# EAGLE board DAC_GainOutputStage5 (EAGLE 9.6.2)
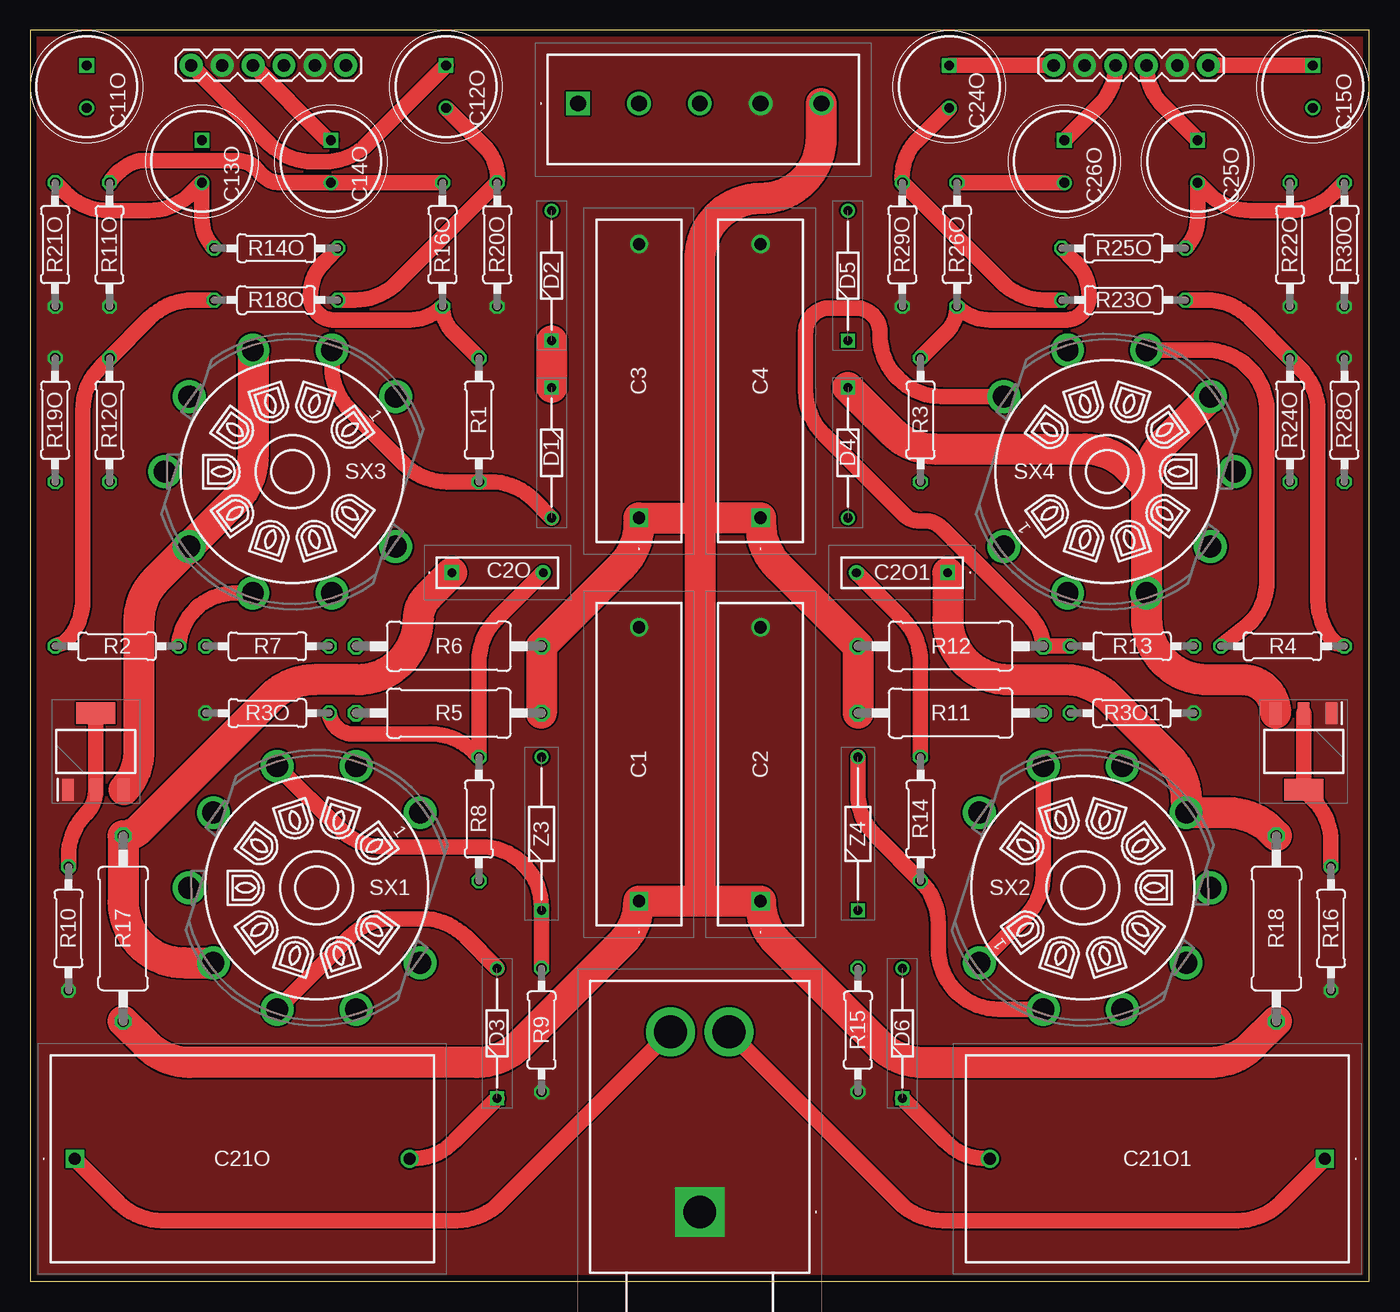
[diagram p0: board, top side]
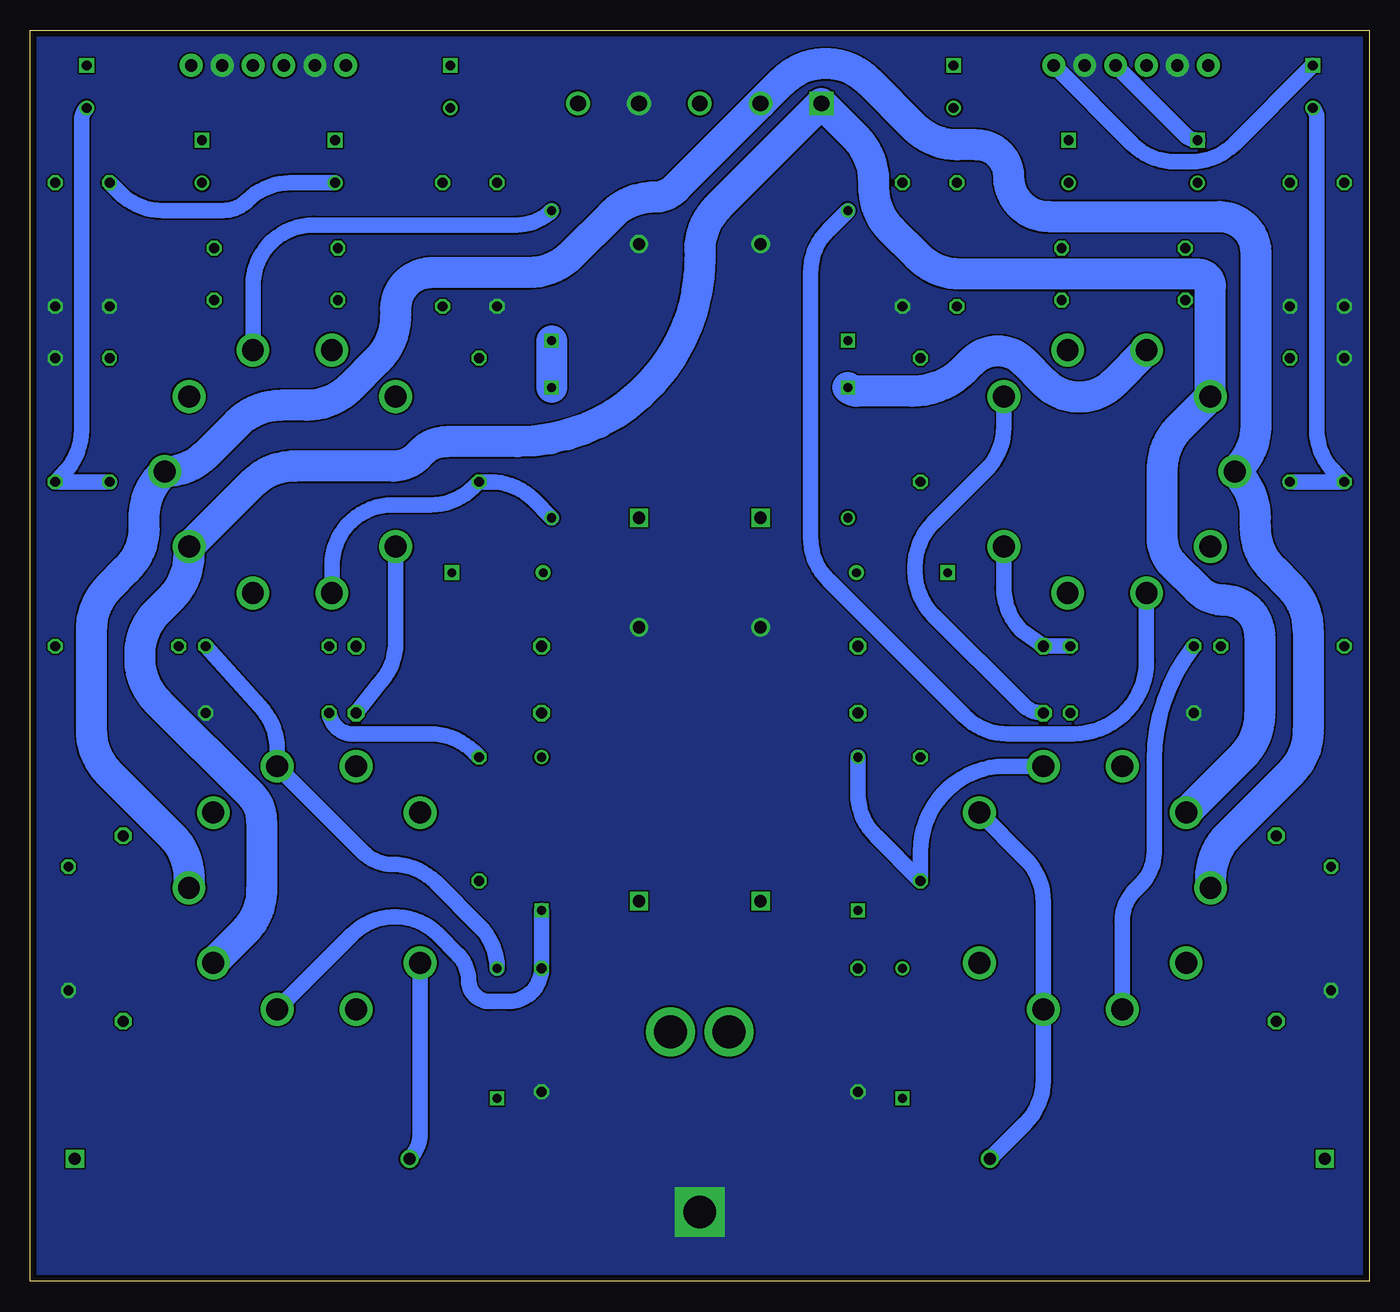
[diagram p1: board, bottom side, seen from below]

Size 110 x 102.8 mm. Coordinates in mm from the lower left corner, seen from the top.
Outline: 0,0 110,0 110,102.8 0,102.8 0,0
Copper layers (1*16): Top 0.035mm / dielectric 1.6mm / Bottom 0.035mm
Design rules "Elecrow_2-layer_PCB_eagle_rule": minimum track width 6mil, minimum drill 12mil, track to track 6mil, track to pad 6mil, pad to pad 6mil, via to via 8mil, smd to smd 0mil, copper to edge 20mil, drill to drill 10mil, minimum pad ring 6mil, minimum via ring 6mil, stop-mask expansion 0mil, vias tented up to drill 100mil, thermal gap 10mil
Net classes: 1 Signal: width 1.272 mm; 2 Power: width 2.54 mm

## Footprints (pad centres in the part's own frame; a part is rotated, then mirrored left to right if it is on the bottom)
MKP4G034705D00KSSD = drill 1 pad 1.5 square: 1 0,0 | drill 1 pad 1.5: 2 22.5,0
MKS4B031002A00JC00 = drill 0.7 pad 1.2 square: 1 0,0 | drill 0.7 pad 1.2: 2 7.5,0
CAPPRD350W60D825H1300 = drill 0.8 pad 1.2 square: 1 0,0 | drill 0.8 pad 1.2: 2 3.5,0
DCP4G053006ID2KSSD = drill 1 pad 1.5 square: 1 0,0 | drill 1 pad 1.5: 2 27.5,0
DIOAD1068W53L380D172 = drill 0.75 pad 1.15 square: 1 0,0 | drill 0.75 pad 1.15: 2 10.7,0
1935190 = drill 1.3 pad 1.95 square: 1 0,0 | drill 1.3 pad 1.95: 2 5,0; 3 10,0; 4 15,0; 5 20,0
1X06 = drill 1.016 pad 1.88: 1 0,0; 2 2.54,0; 3 5.08,0; 4 7.62,0; 5 10.16,0; 6 12.7,0
SJ63033A = drill 2.69 pad 4.035 square: 1 0,0 | drill 2.69 pad 4.035: 2 14.8,-2.4; 3 14.8,2.4
0207/10 = drill 0.813 octagon: 1 -5.08,0; 2 5.08,0
0411/15 = drill 0.914 octagon: 1 -7.62,0; 2 7.62,0
VT9-PT = drill 1.8 pad 2.4: 1 6.172,8.495; 2 0,10.5; 3 -6.172,8.495; 4 -9.986,3.245; 5 -9.986,-3.245; 6 -6.172,-8.495; 7 0,-10.5; 8 6.172,-8.495; 9 9.986,-3.244
SOT230P700X180-4N = smd 1.75 x 0.95: 1 -3.15,2.3; 2 -3.15,0; 3 -3.15,-2.3 | smd 1.75 x 3.2: 4 3.15,0
DIOAD1256W56L444D203 = drill 0.75 pad 1.15 square: 1 0,0 | drill 0.75 pad 1.15: 2 12.6,0

## Placement (x,y rotation side)
C1  MKP4G034705D00KSSD  [MKP4G034705D00KSSD]  50,31.25 90 top
C2  MKP4G034705D00KSSD  [MKP4G034705D00KSSD]  60,31.25 90 top
C2O  0.1uF, 35V  [MKS4B031002A00JC00]  34.62,58.25 0 top
C2O1  0.1uF, 35V  [MKS4B031002A00JC00]  75.38,58.25 180 top
C3  MKP4G034705D00KSSD  [MKP4G034705D00KSSD]  50,62.75 90 top
C4  MKP4G034705D00KSSD  [MKP4G034705D00KSSD]  60,62.75 90 top
C11O  100uF  [CAPPRD350W60D825H1300]  4.62,99.92 270 top
C12O  100uF  [CAPPRD350W60D825H1300]  34.15,99.92 270 top
C13O  100uF  [CAPPRD350W60D825H1300]  14.08,93.78 270 top
C14O  100uF  [CAPPRD350W60D825H1300]  24.69,93.78 270 top
C15O  100uF  [CAPPRD350W60D825H1300]  105.38,99.92 270 top
C21O  30uF/400V  [DCP4G053006ID2KSSD]  3.65,10.08 0 top
C21O1  30uF/400V  [DCP4G053006ID2KSSD]  106.35,10.08 180 top
C24O  100uF  [CAPPRD350W60D825H1300]  75.5,99.92 270 top
C25O  100uF  [CAPPRD350W60D825H1300]  95.92,93.78 270 top
C26O  100uF  [CAPPRD350W60D825H1300]  84.96,93.78 270 top
D1  1N4148-T50R  [DIOAD1068W53L380D172]  42.83,73.45 270 top
D2  1N4148-T50R  [DIOAD1068W53L380D172]  42.83,77.3 90 top
D3  1N4148-T50R  [DIOAD1068W53L380D172]  38.35,15.04 90 top
D4  1N4148-T50R  [DIOAD1068W53L380D172]  67.17,73.45 270 top
D5  1N4148-T50R  [DIOAD1068W53L380D172]  67.17,77.3 90 top
D6  1N4148-T50R  [DIOAD1068W53L380D172]  71.65,15.04 90 top
J1  1935190  [1935190]  45,96.8 0 top
J2  [1X06]  84.09,99.92 0 top
J3  SJ-63033A  [SJ63033A]  55,5.7 90 top
J13  [1X06]  13.21,99.92 0 top
R1  1k  [0207/10]  36.85,70.78 90 top
R2  1k  [0207/10]  7.11,52.2 180 top
R3  1k  [0207/10]  73.15,70.78 90 top
R3O  1M*  [0207/10]  19.48,46.7 180 top
R3O1  1M*  [0207/10]  90.52,46.7 0 top
R4  1k  [0207/10]  102.89,52.2 0 top
R5  9.1k  [0411/15]  34.38,46.7 0 top
R6  9.1k  [0411/15]  34.38,52.2 0 top
R7  1k  [0207/10]  19.48,52.2 0 top
R8  1k  [0207/10]  36.85,38 90 top
R9  330  [0207/10]  42,20.66 90 top
R10  48.7  [0207/10]  3.13,29 90 top
R11  9.1k  [0411/15]  75.62,46.7 180 top
R11O  10k  [0207/10]  6.5,85.2 270 top
R12  9.1k  [0411/15]  75.62,52.2 180 top
R12O  182  [0207/10]  6.5,70.78 270 top
R13  1k  [0207/10]  90.52,52.2 180 top
R14  1k  [0207/10]  73.15,38 90 top
R14O  182  [0207/10]  20.18,84.9 180 top
R15  330  [0207/10]  68,20.66 90 top
R16  48.7  [0207/10]  106.87,29 90 top
R16O  182  [0207/10]  33.86,85.2 90 top
R17  499  [0411/15]  7.62,29 90 top
R18  499  [0411/15]  102.38,29 270 top
R18O  182  [0207/10]  20.18,80.65 0 top
R19O  10k  [0207/10]  2.03,70.78 270 top
R20O  10k  [0207/10]  38.35,85.2 270 top
R21O  10k  [0207/10]  2.03,85.2 90 top
R22O  10k  [0207/10]  103.5,85.2 270 top
R23O  182  [0207/10]  89.82,80.65 180 top
R24O  182  [0207/10]  103.5,70.78 270 top
R25O  182  [0207/10]  89.82,84.9 0 top
R26O  182  [0207/10]  76.14,85.2 90 top
R28O  10k  [0207/10]  107.97,70.78 270 top
R29O  10k  [0207/10]  71.65,85.2 270 top
R30O  10k  [0207/10]  107.97,85.2 90 top
SX1  VT9-PT  [VT9-PT]  23.53,32.35 342 top
SX2  VT9-PT  [VT9-PT]  86.47,32.35 162 top
SX3  VT9-PT  [VT9-PT]  21.53,66.55 342 top
SX4  VT9-PT  [VT9-PT]  88.47,66.55 162 top
U1  LM317MQDCYR  [SOT230P700X180-4N]  5.38,43.55 90 top
U2  LM317MQDCYR  [SOT230P700X180-4N]  104.62,43.55 270 top
Z3  1N750  [DIOAD1256W56L444D203]  42,30.48 90 top
Z4  1N750  [DIOAD1256W56L444D203]  68,30.48 90 top

## Library data of the parts
C1-C4 = Dual Mono Amp Library; DESCRIPTION: 0.47 F Film Capacitor 220V 400V Polypropylene (PP), Metallized Radial; HEIGHT: 16.5mm; MANUFACTURER_NAME: WIMA; MANUFACTURER_PART_NUMBER: MKP4G034705D00KSSD; MOUSER_PART_NUMBER: 505-MKP4G034705DKSSD; MOUSER_PRICE-STOCK: http://www.mouser.com/Search/ProductDetail.aspx?qs=sJjjjplDs9uaOctv9bTMfA%3d%3d
C2O C2O1 = Dual Mono Amp Library; DESCRIPTION: Film Capacitors MKS 4 0.1 uF 50 VDC 2.5x7x10 PCM 7.5; HEIGHT: 7mm; MANUFACTURER_NAME: WIMA; MANUFACTURER_PART_NUMBER: MKS4B031002A00JC00; MOUSER_PART_NUMBER: 505-MKS4B0312AJC; MOUSER_PRICE-STOCK: https://www.mouser.co.uk/ProductDetail/WIMA/MKS4B031002A00JC00?qs=2G4irm%2FqADy9MV8AUfKNYA%3D%3D
C11O C12O C13O C14O C15O C24O C25O C26O = Dual Mono Amp Library; ARROW_PART_NUMBER: UFW1H101MPD1TD; ARROW_PRICE-STOCK: https://www.arrow.com/en/products/ufw1h101mpd1td/nichicon; DESCRIPTION: Aluminum Electrolytic Capacitors - Radial Leaded 100uF 50 Volts 20%; HEIGHT: 13mm; MANUFACTURER_NAME: Nichicon; MANUFACTURER_PART_NUMBER: UFW1H101MPD1TD; MOUSER_PART_NUMBER: 647-UFW1H101MPD1TD; MOUSER_PRICE-STOCK: https://www.mouser.co.uk/ProductDetail/Nichicon/UFW1H101MPD1TD?qs=WJSLByB5Mu30jPPJ2KiG3A%3D%3D
C21O C21O1 = Dual Mono Amp Library; DESCRIPTION: Film Capacitors DC-LINK MKP 4 30.0 uF 400 VDC 17x34.5x31.5 PCM 27.5; HEIGHT: 34.5mm; MANUFACTURER_NAME: WIMA; MANUFACTURER_PART_NUMBER: DCP4G053006ID2KSSD; MOUSER_PART_NUMBER: 505-DCP4G0536ID2KSSD; MOUSER_PRICE-STOCK: https://www.mouser.co.uk/ProductDetail/WIMA/DCP4G053006ID2KSSD?qs=RB4whv9F6rwxZ2Ey0tRejg%3D%3D
D1-D6 = Dual Mono Amp Library; DESCRIPTION: Diodes - General Purpose, Power, Switching Hi Conductance Fast; HEIGHT: mm; MANUFACTURER_NAME: onsemi; MANUFACTURER_PART_NUMBER: 1N4148-T50R; MOUSER_PART_NUMBER: 512-1N4148T50R; MOUSER_PRICE-STOCK: https://www.mouser.co.uk/ProductDetail/onsemi-Fairchild/1N4148-T50R?qs=0lQeLiL1qyZS6rosZp7Ehg%3D%3D
J1 = Dual Mono Amp Library; DESCRIPTION: PCB terminal block, nominal current: 17.5 A, rated voltage (III/2): 400 V, nominal cross section: 1.5 mm?, Number of potentials: 5, Number of rows: 1, Number of positions per row: 5, product range: PT 1,5/..-H, pitch: 5 mm, connection method: Screw connection with wire protector, mounting: Wave soldering, conductor/PCB connection direction: 0 ?, color: green, Pin layout: Linear pinning, Solder pin [P]: 3.5 mm, type of packaging: packed in cardboard; HEIGHT: 11.55mm; MANUFACTURER_NAME: Phoenix Contact; MANUFACTURER_PART_NUMBER: 1935190; MOUSER_PART_NUMBER: 651-1935190; MOUSER_PRICE-STOCK: https://www.mouser.co.uk/ProductDetail/Phoenix-Contact/1935190?qs=QWULklcAmSS%2FS46GSzyZOw%3D%3D
J2 J13 = Dual Mono Amp Library; PROD_ID: CONN-08437
J3 = Dual Mono Amp Library; DESCRIPTION: 6.35 mm, Stereo, Right Angle, Through Hole Mount, 3 Conductors, 0 Internal Switches, Audio Jack Connector; HEIGHT: 12.3mm; MANUFACTURER_NAME: CUI Devices; MANUFACTURER_PART_NUMBER: SJ-63033A
R1-R4 R7 R8 R13 R14 = Dual Mono Amp Library; DESCRIPTION: Body Features: Lead Type Axial-Leaded | Configuration Features: Number of Resistors 1 | Dimensions: Passive Component Dimensions 6.2 x 2.3 MM | Electrical Characteristics: Passive Component Tolerance 1 PCT | Resistance Value 1K OHM | Operating Voltage 350 V | Power Rating .6 WATT | Resistance Class 1k 1M | Packaging Features: Packaging Method Ammo Packed | Product Type Features: Element Type Thin Film | Resistor Type General Purpose Resistor | Termination Features: Termination Area Base Material Cop; HEIGHT: mm; MANUFACTURER_NAME: TE Connectivity; MANUFACTURER_PART_NUMBER: LR1F1K0; MOUSER_PART_NUMBER: 279-LR1F1K0; MOUSER_PRICE-STOCK: https://www.mouser.co.uk/ProductDetail/TE-Connectivity-Holsworthy/LR1F1K0?qs=ip69W3eHERVhMxNSZkerTg%3D%3D
R3O R3O1 = Dual Mono Amp Library; DESCRIPTION: TE Connectivity Axial Metal Film Resistor 1m +/-1% 0.6W +/-50ppm/C; HEIGHT: mm; MANUFACTURER_NAME: TE Connectivity; MANUFACTURER_PART_NUMBER: LR1F1M0; MOUSER_PART_NUMBER: 279-LR1F1M0; MOUSER_PRICE-STOCK: https://www.mouser.co.uk/ProductDetail/TE-Connectivity-Holsworthy/LR1F1M0?qs=ip69W3eHERVt%2FmQVAugcSg%3D%3D
R5 R6 R11 R12 = Dual Mono Amp Library; DESCRIPTION: VISHAY - PR02000209101FA100 - Through Hole Resistor, 9.1 kohm, PR02 Series, 2 W, +/- 5%, Axial Leaded, 500 V; HEIGHT: mm; MANUFACTURER_NAME: Vishay; MANUFACTURER_PART_NUMBER: PR02000209101FA100; MOUSER_PART_NUMBER: 594-PR02000209101FA1; MOUSER_PRICE-STOCK: https://www.mouser.com/ProductDetail/Vishay-BC-Components/PR02000209101FA100?qs=sGAEpiMZZMtlubZbdhIBILAdz%2F2y2rDs5x9O1ZBVKlg%3D
R9 R15 = Dual Mono Amp Library; DESCRIPTION: Body Features: Lead Type Axial-Leaded | Configuration Features: Number of Resistors 1 | Dimensions: Passive Component Dimensions 6.2 x 2.3 MM | Electrical Characteristics: Resistance Value 330 OHM | Power Rating .6 WATT | Passive Component Tolerance 1 PCT | Operating Voltage 350 V | Resistance Class Up to 1k | Packaging Features: Packaging Method Ammo Packed | Product Type Features: Resistor Type General Purpose Resistor | Element Type Thin Film | Termination Features: Number of Terminations 2 | Terminati; HEIGHT: mm; MANUFACTURER_NAME: TE Connectivity; MANUFACTURER_PART_NUMBER: LR1F330R; MOUSER_PART_NUMBER: 279-LR1F330R; MOUSER_PRICE-STOCK: https://www.mouser.co.uk/ProductDetail/TE-Connectivity-Holsworthy/LR1F330R?qs=ip69W3eHERU18wOSJKTVaQ%3D%3D
R10 R16 = Dual Mono Amp Library; DESCRIPTION: Metal Film Resistors - Through Hole 1/8watt 48.7ohms 1% 100ppm; HEIGHT: mm; MANUFACTURER_NAME: Vishay; MANUFACTURER_PART_NUMBER: RN55D48R7FB14; MOUSER_PART_NUMBER: 71-RN55D-F-48.7; MOUSER_PRICE-STOCK: https://www.mouser.com/ProductDetail/Vishay-Dale/RN55D48R7FB14?qs=sGAEpiMZZMsPqMdJzcrNwqLSjlxN7Le6H%2Fnooot2Cxw%3D
R11O R19O R20O R21O R22O R28O R29O R30O = Dual Mono Amp Library; DESCRIPTION: Metal film resistor, 10K 0.6W TE Connectivity LR1F Series Axial Metal Film Resistor 10k; HEIGHT: mm; MANUFACTURER_NAME: TE Connectivity; MANUFACTURER_PART_NUMBER: LR1F10K; MOUSER_PART_NUMBER: 279-LR1F10K; MOUSER_PRICE-STOCK: https://www.mouser.co.uk/ProductDetail/TE-Connectivity-Holsworthy/LR1F10K?qs=ip69W3eHERWDLLWs2Qv0Lg%3D%3D
R12O R14O R16O R18O R23O R24O R25O R26O = Dual Mono Amp Library; DESCRIPTION: Metal Film Resistors - Through Hole 0.6W 1% 182 ohm 50pp m; HEIGHT: mm; MANUFACTURER: Yageo; MANUFACTURER_PART_NUMBER: MF0207FTE52-182R; MOUSER_PART_NUMBER: 603-MF0207FTE52-182R; MOUSER_PRICE-STOCK: https://www.mouser.com/ProductDetail/YAGEO/MF0207FTE52-182R?qs=KUIzHt%2Fe91leK267FaM40g%3D%3D
R17 R18 = Dual Mono Amp Library; DESCRIPTION: VISHAY - PR02000204990FA100 - Through Hole Resistor, 499 ohm, PR02 Series, 2 W, +/- 5%, Axial Leaded, 500 V; HEIGHT: mm; MANUFACTURER_NAME: Vishay; MANUFACTURER_PART_NUMBER: PR02000204990FA100; MOUSER_PART_NUMBER: 594-PR02000204990FA1; MOUSER_PRICE-STOCK: https://www.mouser.com/ProductDetail/Vishay-BC-Components/PR02000204990FA100?qs=bTzheeSci6S93b9bbmXKjA%3D%3D
SX1-SX4 = Dual Mono Amp Library
U1 U2 = Dual Mono Amp Library; DESCRIPTION: Standard Regulator 1.25V to 37V 0.5A Texas Instruments LM317MQDCYR, Single Linear Voltage Regulator, 500mA Adjustable 1.25 37 V, 4-Pin SOT-223; HEIGHT: 1.8mm; MANUFACTURER_NAME: Texas Instruments; MANUFACTURER_PART_NUMBER: LM317MQDCYR; MOUSER_PART_NUMBER: 595-LM317MQDCYR; MOUSER_PRICE-STOCK: https://www.mouser.co.uk/ProductDetail/Texas-Instruments/LM317MQDCYR?qs=VBduBm9rCJSAPGr9YDjocQ%3D%3D
Z3 Z4 = Dual Mono Amp Library; DESCRIPTION: Zener Diodes Voltage Regulator; HEIGHT: mm; MANUFACTURER_NAME: Microsemi Corporation; MANUFACTURER_PART_NUMBER: 1N750; MOUSER_PART_NUMBER: 494-1N750(DO-35); MOUSER_PRICE-STOCK: https://www.mouser.co.uk/ProductDetail/Microchip-Microsemi/1N750?qs=Xwz%252BGKGy4sB1rzIdx4SmVg%3D%3D

## Nets
66.3VAC/1 [Power]: J1.1 SX1.4 SX2.4 SX3.4 SX4.4
66.3VAC/2 [Power]: J1.2 SX1.5 SX2.5 SX3.5 SX4.5
+240VDC [Power]: C1.1 C2.1 C3.1 C4.1 J1.5 R5.2 R6.2 R11.2 R12.2 R17.1 R18.2
AGND [Power]: C1.2 C2.2 C3.2 C4.2 J1.4 J2.2 J2.5 J3.1 J13.2 J13.5 R3O1.2 R3O.2 R9.1 R10.1 R11O.2 R15.1 R16.1 R19O.1 R20O.2 R21O.1 R22O.2 R28O.1 R29O.2 R30O.1 U1.1 U2.1
L+ [Signal]: R4.2 R23O.1 R24O.1
L- [Signal]: R3.2 R25O.1 R26O.1
L_OUT [Signal]: C21O1.1 J3.2
N$1: R6.1 R7.2 SX3.9
N$2: R8.1 SX1.2 Z3.2
N$3: C21O1.2 D6.1 SX2.1 SX2.8
N$4: D4.2 R3.1 SX4.2
N$5: D5.2 R4.1 SX4.7
N$6: D1.2 R1.1 SX3.2
N$7 [Power]: D4.1 D5.1 SX4.3 SX4.6 U2.3
N$8: R11.1 SX4.1
N$9: R12.1 R13.2 SX4.9
N$10: C11O.1 J13.6
N$11: C11O.2 R12O.2 R19O.2
N$12: C15O.1 J2.6
N$13: D2.2 R2.1 SX3.7
N$14: R14.1 SX2.2 Z4.2
N$15: C12O.1 J13.1
N$16: C2O.2 R3O.1 R8.2
N$17: C2O1.2 R3O1.1 R14.2
N$18: C21O.2 D3.1 SX1.1 SX1.8
N$19: C12O.2 R18O.2 R20O.1
N$20: C15O.2 R24O.2 R28O.2
N$21: C13O.1 J13.4
N$22 [Power]: D1.1 D2.1 SX3.3 SX3.6 U1.3
N$23: D3.2 R7.1 SX1.7
N$24: C14O.1 J13.3
N$25: C14O.2 R11O.1 R16O.2
N$26: R9.2 SX1.3 Z3.1
N$27: R15.2 SX2.3 Z4.1
N$28: C13O.2 R14O.2 R21O.2
N$29: D6.2 R13.1 SX2.7
N$30: C24O.1 J2.1
N$31: C24O.2 R23O.2 R29O.1
N$32: C25O.1 J2.4
N$33: C26O.1 J2.3
N$34: C26O.2 R22O.1 R26O.2
N$35: R5.1 SX3.1
N$36: C25O.2 R25O.2 R30O.2
N$37: R10.2 U1.2 U1.4
N$38: R16.2 U2.2 U2.4
N$39 [Power]: C2O.1 R17.2 SX1.6
N$40 [Power]: C2O1.1 R18.1 SX2.6
PE [Power]: J1.3
R+ [Signal]: R2.2 R12O.1 R18O.1
R- [Signal]: R1.2 R14O.1 R16O.1
R_OUT [Signal]: C21O.1 J3.3

## Tracks (layer width: path | path; a pad name or v marks a point on that pad's centre or on a via)
66.3VAC/1
  Bottom 2.54: SX2.4 92.46,28.68 arc-45 91,32.22 91,37.86 arc-45 91.88,39.98 99.54,47.64 arc45 101,51.17 101,51.53 arc45 99.54,55.06 98.43,56.17 arc-45 96.97,59.7 SX4.4 91.81,65.54 arc45 88.27,67 80.16,67 arc-45 78.18,67.82 77.82,68.18 arc45 75.84,69 70,69 arc-90 55,84 55,84.73 arc45 53.54,88.26 J1.1 42.16,93.96 arc45 40.7,90.43 40.7,89.92 arc-45 39.24,86.39 37.09,84.24 arc-45 33.55,82.77 14.03,82.77 arc90 13.03,81.77 SX3.4 15.54,70.22 arc-45 17,66.68 17,61.04 arc-45 16.12,58.92 14.08,56.88 arc-45 11.96,56 arc90 9,53.04 9,46.63 arc45 10.46,43.09 SX1.4
66.3VAC/2
  Bottom 2.54: SX1.5 13.03,33.12 arc45 11.56,36.66 6.46,41.76 arc-45 5,45.3 5,53.53 arc-45 6.46,57.06 7.88,58.48 arc45 9.35,62.01 9.35,62.8 arc-45 10.81,66.33 SX3.5 10.76,66.81 arc-45 9.3,70.35 9.3,84.5 arc-90 12.3,87.5 26.35,87.5 arc90 29.6,90.75 arc-90 32.25,93.4 33.83,93.4 arc45 37.36,94.86 41.11,98.61 arc-90 48.19,98.61 J1.2 56.97,89.83 arc45 58.73,89.1 arc-45 62.26,87.64 65.54,84.36 arc45 69.07,82.9 77,82.9 arc-90 80,79.9 80,79.27 arc45 81.46,75.74 83.74,73.46 arc45 87.27,72 89.45,72 arc-45 92.99,70.54 95.56,67.96 arc45 SX4.5 99.19,66.33 arc-45 100.65,62.8 100.65,62.01 arc45 102.12,58.48 103.54,57.06 arc-45 105,53.53 105,45.3 arc-45 103.54,41.76 98.44,36.66 arc45 96.97,33.12 SX2.5
+240VDC
  Top 2.54: 55,62.75 C3.1 50,62.27 arc-45 48.54,58.73 R6.2 R5.2 | 55,62.75 C4.1 60,62.27 arc45 61.46,58.73 R12.2 R11.2 | 55,31.25 C1.1 arc-45 48.59,27.84 40.21,19.46 arc-45 36.68,18 13.07,18 arc-45 9.54,19.46 R17.1 | 55,31.25 C2.1 arc45 61.41,27.84 69.79,19.46 arc45 73.32,18 96.93,18 arc45 100.46,19.46 R18.2 | J1.5 65,94 arc-90 60,89 arc90 55,84 55,62.75 | 55,62.75 55,31.25
AGND
  pour Bottom (rank 6, no thermals): 0,0 110,0 110,102.8 0,102.8
  pour Top (rank 6, no thermals): 0,0 110,0 110,102.8 0,102.8
L+
  Top 1.272: R23O.1 96.64,80.65 arc-45 100.18,79.18 R24O.1 104.34,75.03 arc-45 105.8,71.49 105.8,55.94 arc45 107.26,52.4 R4.2
L-
  Top 1.272: R3.2 75.25,77.97 arc45 R26O.1 arc45 78.84,79 85,79 arc90 87,81 arc45 85.84,83.8 R25O.1
L_OUT
  Top 1.272: J3.2 71.44,6.46 arc45 74.97,5 99.2,5 arc45 102.73,6.46 C21O1.1
N$1
  Bottom 1.272: R7.2 R6.1 28.56,53.49 arc45 30.02,57.03 SX3.9
N$2
  Bottom 1.272: Z3.2 42,40.14 arc-45 40.54,36.6 R8.1 36.85,35.34 arc90 29.86,42.34 SX1.2
N$3
  Top 1.272: SX2.8 83.23,33.5 arc-45 81.76,29.96 SX2.1 | D6.1 75.14,11.54 arc45 78.67,10.08 C21O1.2
  Bottom 1.272: SX2.1 77.98,12.19 arc45 C21O1.2
N$4
  Bottom 1.272: SX4.2 85.23,58.81 arc90 80.23,63.81 77.11,63.81 arc-45 73.58,65.27 R3.1 72.2,65.7 arc45 68.66,64.24 D4.2
N$5
  Top 1.272: SX4.7 96.6,76.53 arc-90 101.6,71.53 101.6,57.56 arc-45 100.14,54.02 R4.1
  Bottom 1.272: SX4.7 91.72,81.81 arc90 86.72,86.81 70.05,86.81 arc-45 D5.2
N$6
  Top 1.272: SX3.2 24.77,75.16 arc45 26.24,71.63 30.7,67.17 arc45 34.23,65.7 R1.1 37.8,65.7 arc-45 41.34,64.24 D1.2
N$7
  Top 2.54: SX4.6 93.18,68.94 arc45 91.72,65.4 | 91.72,65.4 SX4.3 91.72,54.45 arc90 96.72,49.45 99.58,49.45 arc-90 U2.3 | 91.72,65.4 90.18,66.94 arc45 86.65,68.4 74.3,68.4 arc-45 70.76,69.86 D4.1
  Bottom 2.54: D5.1 D4.1
N$8
  Bottom 1.272: SX4.1 79.98,52.54 arc45 81.44,49 R11.1
N$9
  Top 1.272: R13.2 R12.1 arc45 81.86,54.94 74.88,61.92 arc45 73.48,62.5 72.92,62.5 arc-45 71.86,62.94 65.16,69.64 arc-45 63.7,73.17 63.7,78 arc-90 65.7,80 67.8,80 arc-90 69.8,78 69.8,77.77 arc45 71.26,74.24 71.31,74.19 arc45 74.85,72.72 SX4.9
N$10
  Bottom 1.272: C11O.1 11.09,93.46 arc45 14.62,92 15.92,92 arc45 19.45,93.46 J13.6
N$11
  Bottom 1.272: C11O.2 arc45 4.3,95.64 4.3,70.04 arc-45 2.84,66.51 R19O.2 R12O.2
N$12
  Top 1.272: J2.6 C15O.1
N$13
  Top 1.272: R2.1 arc-90 17.06,56.56 SX3.7
  Bottom 1.272: D2.2 44.44,86.39 arc-45 45.9,82.85 45.9,61.17 arc-45 44.44,57.64 33.26,46.46 arc-45 29.73,45 24.28,45 arc-90 18.28,51 SX3.7
N$14
  Top 1.272: Z4.2 68,40.14 arc45 69.46,36.6 R14.1 arc-45 74.6,29.41 74.6,27.36 arc90 79.6,22.36 SX2.2
N$15
  Top 1.272: J13.1 19.67,93.46 arc45 23.21,92 24.15,92 arc45 27.69,93.46 C12O.1
N$16
  Top 1.272: C2O.2 38.32,54.44 arc45 36.85,50.91 R8.2 36.4,43.54 arc45 32.86,45 26.76,45 arc-90 R3O.1
N$17
  Top 1.272: R14.2 73.14,50.91 arc45 71.68,54.44 C2O1.2
  Bottom 1.272: R14.2 73.6,43.54 arc-45 77.14,45 83.24,45 arc90 R3O1.1
N$18
  Top 1.272: C21O.2 31.33,10.08 arc45 34.86,11.54 D3.1
  Bottom 1.272: SX1.1 28.24,34.74 arc45 26.77,31.2 SX1.8 26.77,16.53 arc45 28.24,12.99 C21O.2
N$19
  Top 1.272: C12O.2 37.54,93.03 arc-45 R20O.1 30.19,82.11 arc-45 26.65,80.65 R18O.2
N$20
  Bottom 1.272: C15O.2 arc-45 105.8,95.4 105.8,69.94 arc45 107.26,66.41 R28O.2 R24O.2
N$21
  Bottom 1.272: C13O.1 arc45 15.12,94.21 J13.4
N$22
  Top 2.54: SX3.3 18.28,67.7 arc-45 16.82,64.16 SX3.6 10.36,57.71 arc45 8.9,54.17 8.9,43.81 arc-45 U1.3 | D2.1 D1.1
  Bottom 2.54: SX3.3 20.98,73.84 arc90 26.64,73.84 28.38,75.58 arc-90 32.62,75.58 33.29,74.91 arc45 37.55,73.15 42.1,73.15 arc45 D1.1
N$23
  Top 1.272: D3.2 35.74,28.35 arc45 32.21,29.81 29.8,29.81 arc45 26.26,28.35 SX1.7
  Bottom 1.272: SX1.7 20.28,29.61 arc45 19.22,32.18 18.72,32.68 arc-45 17.66,35.24 17.66,42.86 arc38 14.47,52.1 R7.1
N$24
  Top 1.272: J13.3 24.26,93.96 arc45 C14O.1
N$25
  Top 1.272: R11O.1 arc-45 8.99,92.1 17.04,92.1 arc-45 18.45,91.51 19.1,90.87 arc45 20.52,90.28 C14O.2 R16O.2
N$26
  Top 1.272: R9.2 Z3.1 42,30.72 arc90 37,35.72 28.97,35.72 arc-45 25.43,37.19 SX1.3
N$27
  Bottom 1.272: Z4.1 R15.2 arc90 70.73,23 72.24,23 arc90 74,24.76 arc-45 74.88,26.88 76.5,28.5 arc-90 83.58,28.5 SX2.3
N$28
  Top 1.272: R14O.2 arc-45 14.08,87.36 C13O.2 13.27,89.46 arc-45 9.73,88 6.38,88 arc-45 2.85,89.46 R21O.2
N$29
  Bottom 1.272: D6.2 arc-45 73.06,29.15 76.72,32.81 arc-45 80.25,34.27 arc45 82.64,35.26 SX2.7 89.72,43.74 arc-45 91.18,47.27 R13.1
N$30
  Top 1.272: J2.1 C24O.1
N$31
  Top 1.272: C24O.2 72.71,93.63 arc45 R29O.1 79.81,82.11 arc45 83.35,80.65 R23O.2
N$32
  Top 1.272: J2.4 arc45 93.08,96.62 C25O.1
N$33
  Top 1.272: C26O.1 87.8,96.62 arc45 J2.3
N$34
  Top 1.272: R26O.2 C26O.2
  Bottom 1.272: C26O.2 88.65,90.28 arc-45 92.18,88.82 arc45 94.15,88 99.15,88 arc45 102.68,89.46 R22O.1
N$35
  Bottom 1.272: SX3.1 30.02,70.19 arc45 31.49,66.66 35.84,62.31 arc-45 37.3,58.77 37.3,58.31 arc-45 35.84,54.78 28.47,47.41 arc-45 R5.1
N$36
  Top 1.272: R25O.2 arc45 95.92,87.36 C25O.2 96.73,89.46 arc45 100.27,88 103.62,88 arc45 107.15,89.46 R30O.2
N$37
  Top 1.272: U1.4 U1.2 arc-45 4.55,38.41 arc45 3.13,34.98 R10.2
N$38
  Top 1.272: U2.2 U2.4 105.41,39.62 arc-45 106.87,36.09 R16.2
N$39
  Top 2.54: SX1.6 12.62,26.18 arc-90 7.62,31.18 R17.2 arc45 8.99,37.19 19.79,47.99 arc-45 23.32,49.45 26.87,49.45 arc90 31.87,54.45 arc-45 32.61,56.23 C2O.1
N$40
  Top 2.54: R18.1 101.94,37.06 arc45 98.4,38.52 SX2.6 94.97,39.56 arc45 93.5,43.1 88.61,47.99 arc45 85.08,49.45 80.38,49.45 arc-90 75.38,54.45 C2O1.1
R+
  Top 1.272: R18O.1 13.36,80.65 arc45 9.82,79.18 R12O.1 5.76,75.13 arc45 4.3,71.59 4.3,56.04 arc-45 2.84,52.5 R2.2
R-
  Top 1.272: R1.2 34.75,77.97 arc-45 R16O.1 arc-45 31.16,79 25,79 arc-90 23,81 arc-45 24.16,83.8 R14O.1
R_OUT
  Top 1.272: J3.3 38.56,6.46 arc-45 35.03,5 10.8,5 arc-45 7.26,6.46 C21O.1